# Altium PCB contador_geiger.PcbDoc
Units mm, origin at the board's own origin, x right, y up, seen from the top; angles counter-clockwise.
Board outline 120 x 75 mm, 2 copper layers (Top Layer, Bottom Layer), stack 1.63 mm thick; 53 components, 33 nets, 139 pads, 0 vias.
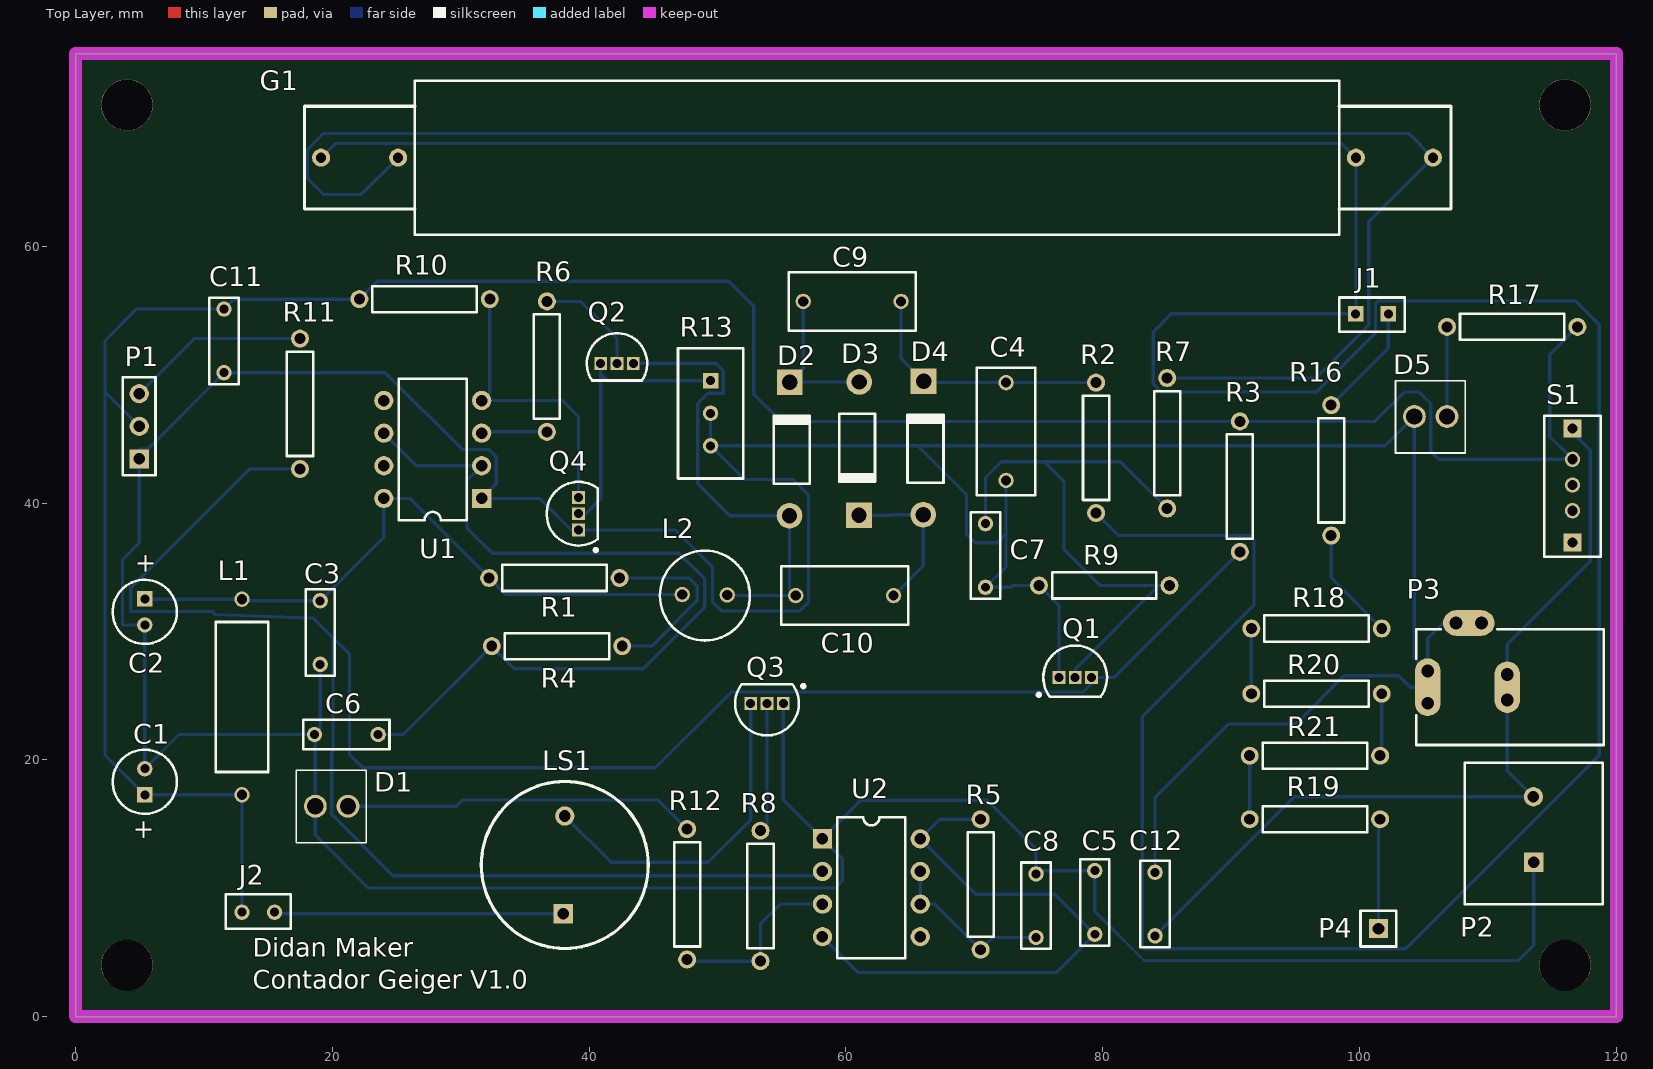
[diagram p0: Top Layer view]
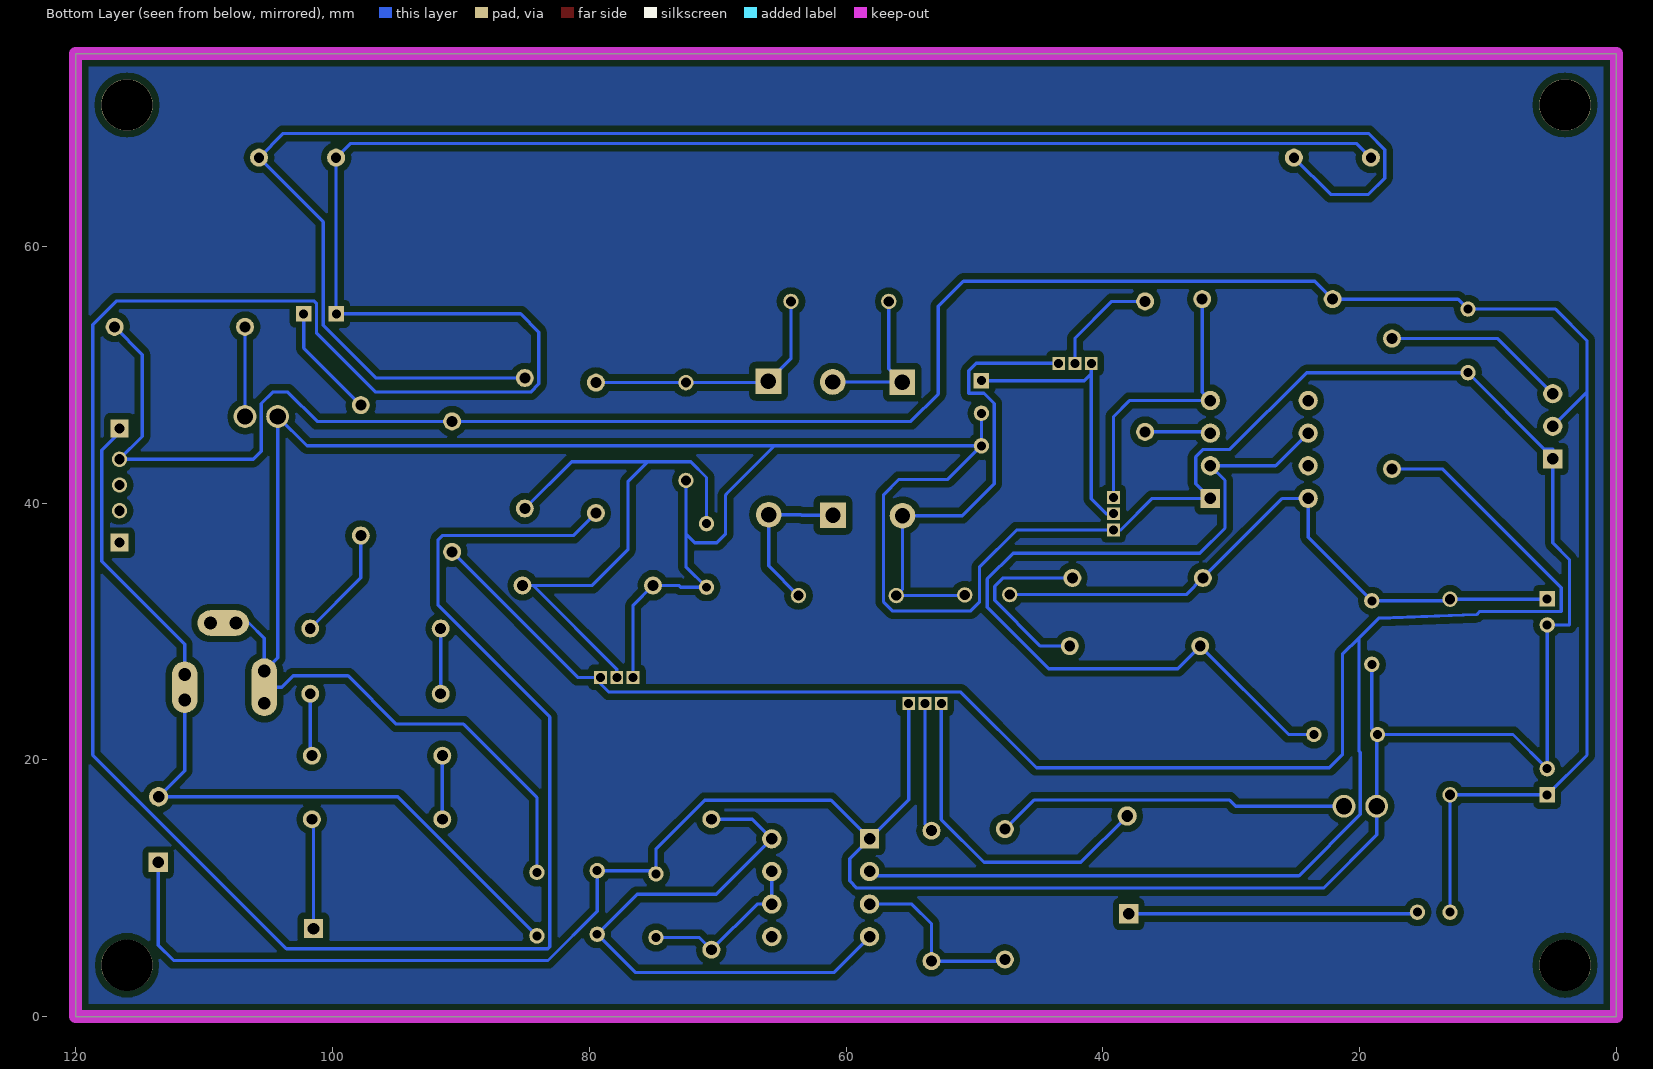
[diagram p1: Bottom Layer view, seen from below]
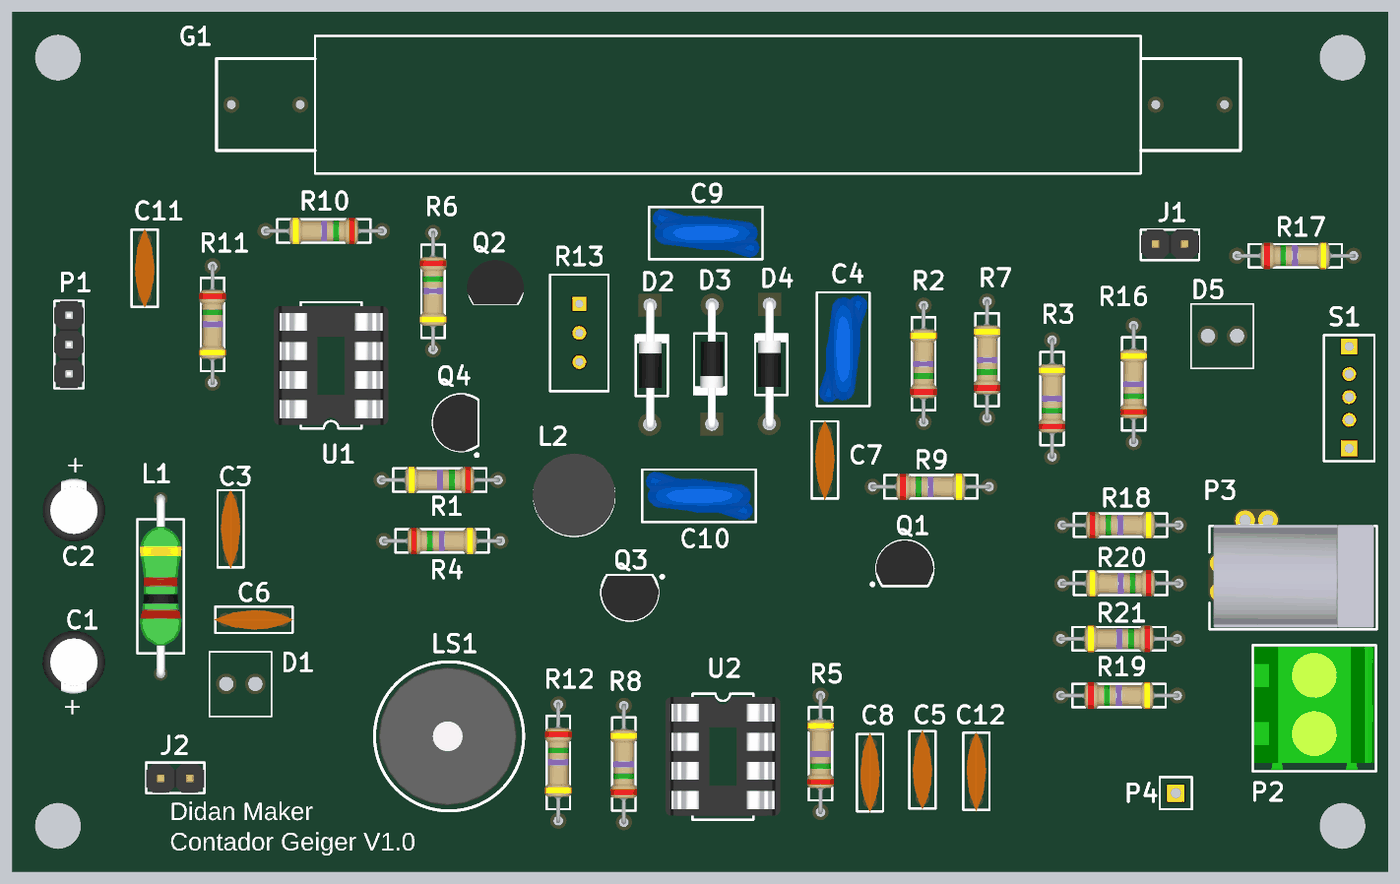
[diagram p2: 3D render of the assembled board from above, using the file's embedded part models]

## Layer stack, top to bottom
Top Solder: solder mask 0.0102, Solder Resist, Dk 3.5
Top Layer: signal copper -0.006
Dielectric 1: dielectric 1.6, FR-4, Dk 4.8
Bottom Layer: signal copper 0.0356
Bottom Solder: solder mask 0.0102, Solder Resist, Dk 3.5

## Board outline
0,0 0,75 120,75 120,0

## Design rules (kind name [scope] priority, off if disabled: settings)
Clearance Clearance_3 [InNamedPolygon('Bottom Layer')] p1: gap=0.5 ignorepadtopadclearanceinfootprint=FALSE
Clearance Clearance_2 [InNamedPolygon('Bottom Layer')] p2: gap=1 ignorepadtopadclearanceinfootprint=FALSE
Clearance Clearance_1 [InNamedPolygon('Bottom Layer')] p3: gap=2 ignorepadtopadclearanceinfootprint=FALSE
Clearance [All] p4: gap=0.254 ignorepadtopadclearanceinfootprint=FALSE
MinimumSolderMaskSliver [All] p1: minsoldermaskwidth=0.1
PolygonConnect [All] p1: connectstyle=Relief reliefconductorwidth=0.254 reliefentries=4 polygonreliefangle="90 Angle" airgapwidth=0.254
RoutingLayers [All] p1: top layer_v5=FALSE bottom layer_v5=TRUE
RoutingVias [All] p1: holewidth=0.711 width=1.27 viastyle="Through Hole" minholewidth=0.711 minwidth=1.27 maxholewidth=0.711 maxwidth=1.27
SilkToSolderMaskClearance [IsPad] p1: minsilkscreentomaskgap=0.1 clearancetoexposedcopper=TRUE
SolderMaskExpansion [All] p1: expansion=0.102
Width [All] p1: maxlimit=0.254 minlimit=0.254 preferedwidth=0.254
27 further rules are at their usual default settings.

## Classes and differential pairs
component class contador_geiger: C1 C2 C4 C5 C6 C7 C8 C9 C10 C12 D1 D2 D3 D4 D5 G1 J1 J2 L2 LS1 P2 P3 P4 Q1 Q2 Q3 Q4 R1 R2 R3 R4 R5 R6 R7 R8 R9 R10 R12 R13 R16 R17 R18 R19 R20 R21 S1 U1 U2

## Components (designator, comment, footprint, x,y, rotation, side; value= is the part's Value field where it differs from the comment)
C1 "Cap Pol1" RB7.6-15 5.385,18.288 r270 top value=100uF
C2 "Cap Pol1" RB7.6-15 5.385,31.521 r90 top value=100uF
C3 "Cap" RAD-0.3 19.05,29.909 r90 top value=100nF
C4 "10nF 1000V" Cap_10nF_1000V 72.466,48.489 r90 top
C5 "Cap" RAD-0.3 79.375,8.89 r270 top value=100nF
C6 "Cap" RAD-0.3 21.082,21.971 r0 top value=1nF
C7 "Cap" RAD-0.3 70.866,35.916 r90 top value=270pF
C8 "Cap" RAD-0.3 74.803,8.636 r270 top value=100nF
C9 "10nF 1000V" Cap_10nF_1000V 63.398,55.702 r0 top
C10 "10nF 1000V" Cap_10nF_1000V 62.814,32.791 r0 top
C11 "Cap" RAD-0.3 11.557,52.629 r270 top value=100nF
C12 "Cap" RAD-0.3 84.074,8.763 r90 top value=100nF
D1 "LED1" LED-0 19.939,16.383 r0 top
D2 "Diode 1N4937" DO-41 55.778,44.145 r90 top
D3 "Diode 1N4937" DO-41 60.858,44.298 r270 top
D4 "Diode 1N4937" DO-41 66.192,44.221 r90 top
D5 "LED1" LED-0 105.537,46.736 r0 top
G1 "Geiger" "TUBO GEIGER" 26.416,72.898 r0 top
J1 "Jumper" RAD-0.2#1 100.838,54.737 r180 top
J2 "Jumper" RAD-0.2#2 14.351,8.128 r0 top
L1 "Indutor_100uH" INDUTOR_100UH 14.478,20.828 r90 top
L2 "Indutor_10mH" INDUTOR_10MH 51.689,34.646 r0 top
LS1 "Speaker" PIN2 38.735,14.097 r270 top
P1 "ARDUINO" HDR1X3 4.953,43.434 r90 top
P2 "KRE-2" HDR1X2 114.046,12.827 r90 top
P3 "JACK" KLD-0202 119.006,25.654 r180 top
P4 "Plug" PIN1 101.473,6.858 r0 top
Q1 "2N3904" TO-92A 77.851,26.416 r270 top
Q2 "MPSA42" ONSC-TO-92-3-29-11 42.164,50.876 r0 top
Q3 "2N3904" TO-92A 53.848,24.384 r90 top
Q4 "2N3904" TO-92A 39.167,39.167 r0 top
R1 "Res2" AXIAL-0.4 37.033,31.75 r180 top value=33K
R2 "Res2" AXIAL-0.4 77.064,44.552 r90 top value=10M
R3 "Res2" AXIAL-0.4 88.265,41.529 r90 top value=47K
R4 "Res2" AXIAL-0.4 37.744,31.267 r0 top value=33K
R5 "Res2" AXIAL-0.4 68.072,10.541 r90 top value=470K
R6 "Res2" AXIAL-0.4 39.116,50.368 r270 top value=3K
R7 "Res2" AXIAL-0.4 82.601,44.907 r90 top value=10K
R8 "Res2" AXIAL-0.4 50.927,9.652 r90 top value=10K
R9 "Res2" AXIAL-0.4 80.366,35.992 r0 top value=470K
R10 "Res2" AXIAL-0.4 26.924,53.467 r180 top value=100K
R11 "Res2" AXIAL-0.4 19.888,47.473 r270 top value=470K
R12 "Res2" AXIAL-0.4 50.038,9.271 r270 top value=1K
R13 "RPot" VR5 49.454,46.99 r270 top value=100R
R16 "Res2" AXIAL-0.4 95.377,42.799 r90 top value=10M
R17 "Res2" AXIAL-0.4 112.141,56.134 r0 top value=1k
R18 "Res2" AXIAL-0.4 96.901,32.639 r0 top value=10M
R19 "Res2" AXIAL-0.4 96.774,17.78 r0 top value=10M
R20 "Res2" AXIAL-0.4 96.393,22.733 r180 top value=10M
R21 "Res2" AXIAL-0.4 96.266,17.907 r180 top value=10M
S1 "Chave_5_terminais" CHAVE_5_TERMINAIS 114.386,35.802 r0 top
U1 "TS555CN" DIP8 27.813,44.171 r90 top
U2 "TS555CN" DIP8 61.976,10.033 r270 top

## Footprints (in the part's own frame and the unit in brackets; to place one, negate y for a bottom-side part, rotate by r counter-clockwise, add the part's x,y. Pads: shape width x height; smd on the part's side, far side on the other; paste and mask are expansions set on the pad)
AXIAL-0.4 [mm] "Axial Device, Thru-Hole; 2 Leads; 0.4 in Pin Spacing"
  round 1.4 hole 0.85 unplated: 1(-5.334,-2.413) 2(4.826,-2.413)
  silkscreen extent -4.32,-3.43 3.81,-1.4, body extent -5.51,-3.57 5,-1.26, height 2.51
Cap_10nF_1000V [mm]
  round 1.2 hole 0.8 unplated: 1(-6.731,0) 2(0.889,0)
  silkscreen extent -7.87,-2.29 2.03,2.29, body extent -7.55,-2.13 1.76,2.11, height 11.6
CHAVE_5_TERMINAIS [mm]
  rect 1.4x1.4 hole 0.8: 1(2.2,10) 5(2.2,1.12)
  round 1.2 hole 0.8: 2(2.2,7.6) 3(2.2,5.6) 4(2.2,3.6)
  silkscreen extent 0,0 4.4,11
DIP8 [mm] "DIP; 8 Leads; Row Spacing 7.62 mm; Pitch 2.54 mm"
  rect 1.5x1.5 hole 0.9 unplated: 1(-3.81,-3.81)
  round 1.5 hole 0.9 unplated: 2(-1.27,-3.81) 3(1.27,-3.81) 4(3.81,-3.81) 5(3.81,3.81) 6(1.27,3.81) 7(-1.27,3.81) 8(-3.81,3.81)
  silkscreen extent -5.5,-2.65 5.5,2.65, body extent -5.21,-5 5.15,5, height 7.13
DO-41 [mm] "Diode, Axial; Body 5.2 x 2.7 mm (LxDia. max), Lead Dia. 0.86 mm (max)"
  round 2 hole 1.2 unplated: 1(-5.131,0.178)
  rect 2x2 hole 1.2 unplated: 2(5.258,0.152)
  silkscreen extent -2.65,-1.4 2.75,1.4, body extent -5.51,-0.86 5.66,1.14, height 1
HDR1X2 [mm] "Connector; Header; 2 Position"
  rect 1.5x1.5 hole 0.9 unplated: 1(-0.813,0.483)
  round 1.5 hole 0.9 unplated: 2(4.293,0.508)
  silkscreen extent -4.06,-4.88 6.93,5.87, body extent -3.93,-4.76 6.83,5.74, height 14.85
HDR1X3 [mm] "Connector; Header; 3 Position"
  rect 1.5x1.5 hole 0.9 unplated: 1(0,0)
  round 1.5 hole 0.9 unplated: 2(2.54,0) 3(5.08,0)
  silkscreen extent -1.27,-1.27 6.35,1.27, body extent -1.27,-1.27 6.35,1.27, height 8.6
INDUTOR_10MH [mm]
  round 1.2 hole 0.8 unplated: 1(-4.445,-1.778) 2(-0.94,-1.803)
  silkscreen extent -6.18,-5.35 0.82,1.65, body extent -6.3,-5.38 0.91,1.83, height 11
INDUTOR_100UH [mm]
  round 1.2 hole 0.8 unplated: 1(-3.556,1.524) 2(11.684,1.524)
  silkscreen extent -1.78,-0.51 9.91,3.56, body extent -3.91,-0.31 12.03,3.36, height 3.5
KLD-0202 [mm] "DC Power Jack, 2.5mm, KLD Series, PCB Mount"
  oval 2x4.5 all layers, no hole: 1(13.7,0)
  round 1.5 hole 1: 1A(13.7,-1.25) 1B(13.7,1.25) 2A(7.5,-1) 2B(7.5,1) 3A(9.5,-5) 3B(11.5,-5)
  oval 2x4 all layers, no hole: 2(7.5,0)
  oval 4x2 all layers, no hole: 3(10.5,-5)
  silkscreen extent 0,-4.5 14.6,4.5, body extent 0.25,-4.64 14.26,4.37, height 13.12
LED-0 [mil] "LED; 2 Leads"
  round 70 hole 50 unplated: 1(50,0) 2(-50,0)
  silkscreen extent -108,-112 106,110, body extent -100,-104 100,96, height 339
ONSC-TO-92-3-29-11 [mm] "TO, 3-Leads, Body Dia 4.7mm, Pitch 1.27mm"
  rect 1x1 hole 0.7 unplated: 1(-1.27,0) 2(0,0) 3(1.27,0)
  silkscreen extent -2.35,-1.34 2.35,2.35, body extent -2.53,-1.38 2.47,2.49, height 10.5
PIN1 [mm] "Connector; Plug"
  rect 1.5x1.5 hole 0.9: 1(0,0)
  silkscreen extent -1.4,-1.4 1.4,1.4
PIN2 [mm] "Photosensitive Diode; 2 Leads"
  rect 1.5x1.5 hole 0.9 unplated: 1(6.096,-0.762)
  round 1.5 hole 0.9 unplated: 2(-1.524,-0.635)
  silkscreen extent -4.21,-7.13 8.79,5.86, body extent -3.71,-6.75 8.29,5.25, height 11.5
RAD-0.2#1 [mm] "Radial Cap, Thru-Hole; 2 Leads; 0.2 in Pin Spacing"
  rect 1.2x1.2 hole 0.7 unplated: 1(-1.397,0) 2(1.143,0)
  silkscreen extent -2.67,-1.27 2.41,1.4, body extent -2.67,-1.27 2.41,1.27, height 8.6
RAD-0.2#2 [mm] "Radial Cap, Thru-Hole; 2 Leads; 0.2 in Pin Spacing"
  round 1.2 hole 0.7 unplated: 1(-1.397,0) 2(1.143,0)
  silkscreen extent -2.67,-1.27 2.41,1.4, body extent -2.67,-1.27 2.41,1.27, height 8.6
RAD-0.3 [mm] "Radial Cap, Thru-Hole; 2 Leads; 0.3 in Pin Spacing"
  round 1.2 hole 0.7 unplated: 1(-2.476,0) 2(2.476,0)
  silkscreen extent -3.37,-1.14 3.37,1.14, body extent -3.52,-0.85 3.47,0.85, height 7.82
RB7.6-15 [mm] "Polarized Capacitor (Radial); 2 Leads"
  rect 1.2x1.2 hole 0.7 unplated: 1(1.016,0)
  round 1.2 hole 0.7 unplated: 2(-1.016,0)
  silkscreen extent -2.5,-2.5 2.5,2.5, body extent -2.75,-2.75 2.75,2.75, height 12.5
TO-92A [mm] "TO, Flat Index; 3 In-Line, Axial Leads; Body Dia. 4.5mm; Leads 0.51 x 0.48 mm (max)"
  rect 1x1 hole 0.7 unplated: 1(0,-1.27) 2(0,0) 3(0,1.27)
  silkscreen extent -2.48,-2.95 1.5,2.48, body extent -2.49,-2.53 1.38,2.47, height 8.5
"TUBO GEIGER" [mm]
  round 1.4 hole 0.8 unplated: 1(-7.3,-6) 1(73.3,-6) 2(-1.3,-6) 2(79.3,-6)
  silkscreen extent -8.6,-12 80.7,0
VR5 [mm] "Thru-Hole; 3 Leads"
  rect 1.2x1.2 hole 0.7: 1(-2.54,0)
  round 1.2 hole 0.7: 2(0,0) 3(2.54,0)
  silkscreen extent -5.08,-2.54 5.08,2.54, body extent -4.85,-2.54 4.85,2.24, height 11.11

## Part data
C1 C2: "Polarized Capacitor (Radial)", LatestRevisionDate=17-Jul-2002, LatestRevisionNote="Re-released for DXP Platform.", PackageDescription="Polarized Capacitor (Radial); 2 Leads", PackageReference=RB7.6-15, Published=8-Jun-2000, Publisher="Altium Limited"
C3 C5 C6 C7 C8 C11 C12: "Capacitor", LatestRevisionDate=17-Jul-2002, LatestRevisionNote="Re-released for DXP Platform.", PackageDescription="Radial Cap, Thru-Hole; 2 Leads; 0.3 in Pin Spacing", PackageReference=RAD-0.3, Published=8-Jun-2000, Publisher="Altium Limited"
C4 C9 C10: library part Capacitor_10n/1000V
D1 D5: library part LED0, "Typical INFRARED GaAs LED", LatestRevisionDate=08-Jul-2005, LatestRevisionNote="Mech Layer 1 removed.", PackageDescription="LED; 2 Leads", PackageReference=LED-0, Published=8-Jun-2000, Publisher="Altium Limited"
D2 D3 D4: library part "Diode 1N4934", "1 Amp Fast Recovery Rectifier", Code_JEDEC=DO-204-AL, ComponentLink1Description="Manufacturer Link", ComponentLink1URL=http://www.fairchildsemi.com/, ComponentLink2Description=Datasheet, ComponentLink2URL=http://www.fairchildsemi.com/ds/1N%2F1N4934.pdf, DatasheetVersion=1999, LatestRevisionDate=17-Jul-2002, LatestRevisionNote="Re-released for DXP Platform.", PackageDescription="Diode, Axial; Body 5.2 x 2.7 mm (LxDia. max), Lead Dia. 0.86 mm (max)", PackageReference=DO-41, PackageVersion=Aug-1999, Published=8-Jun-2000, Publisher="Altium Limited"
G1: library part Tubo_Geiger
J1 J2: "Jumper Wire", LatestRevisionDate=17-Jul-2002, LatestRevisionNote="Re-released for DXP Platform.", PackageDescription="Radial Cap, Thru-Hole; 2 Leads; 0.2 in Pin Spacing", PackageReference=RAD-0.2, Published=24-Mar-1999, Publisher="Altium Limited"
LS1: "Loudspeaker", LatestRevisionDate=17-Jul-2002, LatestRevisionNote="Re-released for DXP Platform.", PackageReference=PIN2, Published=24-Mar-1999, Publisher="Altium Limited"
P1: library part "Header 3", "Header, 3-Pin", LatestRevisionDate=17-Jul-2002, LatestRevisionNote="Re-released for DXP Platform.", Publisher="Altium Limited"
P2: library part "Header 2", "Header, 2-Pin", LatestRevisionDate=17-Jul-2002, LatestRevisionNote="Re-released for DXP Platform.", Publisher="Altium Limited"
P3: library part PWR2.5, "Low Voltage Power Supply Connector", ComponentLink1Description="Manufacturer Link", ComponentLink1URL=http://domino.kycon.com/internet/Products.html, DatasheetDocument=09-May-2002, Published=17-Dec-2003, Publisher="Altium Limited"
Q1 Q3 Q4: "NPN General Purpose Amplifier", ComponentLink1Description="Manufacturer Link", ComponentLink1URL=http://www.fairchildsemi.com/, ComponentLink2Description=Datasheet, ComponentLink2URL=http://www.fairchildsemi.com/ds/2N%2F2N3904.pdf, DatasheetVersion=1997, LatestRevisionDate=15-Jan-2003, LatestRevisionNote="PCB Footprint 'BCY-W3/D4.7' replaced", PackageDescription="TO, Flat Index; 3 In-Line, Axial Leads; Body Dia. 4.5mm; Leads 0.51 x 0.48 mm (max)", PackageReference=TO-92A, PackageVersion=Sep-1998, Published=8-Jun-2000, Publisher="Altium Limited"
Q2: "High Voltage Transistor, NPN Silicon, 3-Pin TO-92, Bulk Box", Manufacturer="On Semiconductor", ComponentLink1Description="Manufacturer URL", ComponentLink1URL=http://www.onsemi.com/, ComponentLink2Description=Datasheet, ComponentLink2URL=http://www.onsemi.cn/pub_link/Collateral/MPSA42-D.PDF, ComponentLink3Description="Package Specification", ComponentLink3URL=http://www.onsemi.cn/pub_link/Collateral/2N6426-D.PDF, DatasheetVersion="Rev. 8", fT Min (MHz)=50, IC Continuous (A)=0.5, Mounting Technology="Through Hole", Note=0, PackageDescription="3-Pin Transistor Outline, Body 4.825 x 3.685 mm, Pitch 1.27 mm", PackageReference=TO-92-3-29-11_AM_SL, PackageVersion="Rev. AM", Packing="Bulk Box", PartNumber=MPSA42, Polarity=NPN, RoHS=FALSE
R1 R2 R3 R4 R5 R6 R7 R8 R9 R10 R11 R12 R16 R17 R18 R19 R20 R21: "Resistor", LatestRevisionDate=17-Jul-2002, LatestRevisionNote="Re-released for DXP Platform.", PackageDescription="Axial Device, Thru-Hole; 2 Leads; 0.4 in Pin Spacing", PackageReference=AXIAL-0.4, Published=8-Jun-2000, Publisher="Altium Limited"
R13: "Potentiometer", LatestRevisionDate=17-Jul-2002, LatestRevisionNote="Re-released for DXP Platform.", PackageDescription="Variable Resistor, Thru-Hole; 3 Leads", PackageReference=VR5, Published=8-Jun-2000, Publisher="Altium Limited", Set Position=0.5, Sim Note="Enter the Resistance value and the set point into parameter fields."
U1 U2: "Low-Power Single CMOS Timer", Code_JEDEC=MO-001-AN, ComponentLink1Description="Manufacturer Link", ComponentLink1URL=http://www.st.com/, ComponentLink2Description=Datasheet, ComponentLink2URL=http://www.st.com/stonline/products/literature/ds/4077/ts555.pdf, DatasheetVersion=Jan-1999, LatestRevisionDate=06-Jun-2005, LatestRevisionNote="Stylized 3D Model Added.", PackageDescription="DIP; 8 Leads; Row Spacing 7.62 mm; Pitch 2.54 mm", PackageReference=DIP8, Published=24-Aug-2001, Publisher="Altium Limited"
P4: LatestRevisionDate=17-Jul-2002, LatestRevisionNote="Re-released for DXP Platform.", Publisher="Altium Limited"

## Free pads (board coordinates)
  round 4 hole 4 unplated: FIX(4,4) FIX(4,71) FIX(116,4) FIX(116,71)

## Nets (pads, with @x,y where several pads share a name; then routed paths per layer and width w, separated by ;. In a path a pad name is that pad's centre, name@x,y a point inside that pad or via, vN(x,y) a via of type N, cw(c..) or ccw(c..) an arc to the next point about the centre after c; other vN are vias at no path point)
5V: C1.1 C11.1 J2.1 L1.1 P1.2 R3.2 R10.2 R17.2 S1.2 | length 199.1
  Bottom Layer w0.254: 2.299,48.628 P1.2 ; J2.1 L1.1 C1.1 2.286,20.371 2.286,52.654 4.737,55.105 C11.1 12.332,55.88 R10.2 23.495,57.277 50.851,57.277 52.807,55.321 52.807,48.489 54.94,46.355 R3.2 101.194,46.355 103.48,48.641 104.648,48.641 105.537,47.752 105.537,44.037 106.172,43.402 S1.2 114.808,45.18 114.808,51.562 R17.2
"400V HV TP": J1.1 R16.2 | length 9
  Bottom Layer w0.254: R16.2 102.235,52.07 J1.1
GND: C1.2 C2.2 C3.1 C4.1 C5.1 C6.1 C7.1 C8.1 C11.2 C12.2 D1.2 D5.2 P1.1 P2.1 P3.1 P3.1A P3.1B P3.3 P3.3A P3.3B Q1.1 Q3.1 Q4.1 R9.1 R13.2 R13.3 U1.1 U2.1 | length 423.6
  Bottom Layer w0.254: C3.1 19.05,22.415 C6.1 ; R13.2 R13.3 ; Q3.1 55.118,16.891 U2.1 ; C4.1 72.466,37.592 ; Q1.1 76.581,32.029 R9.1 73.012,33.579 72.873,33.439 C7.1 72.466,35.039 72.466,37.592 ; C12.2 84.074,17.069 89.789,22.784 95.021,22.784 98.781,26.543 103.048,26.543 103.937,25.654 P3.1 ; P3.1B P3.1 ; P3.3A P3.3 P3.3B 106.496,30.654 105.306,29.464 P3.1A ; P2.1 113.563,5.563 112.37,4.369 83.21,4.369 79.375,8.204 C5.1 75.057,11.367 C8.1 74.803,13.03 70.993,16.84 61.163,16.84 U2.1 ; C6.1 18.669,21.907 D1.2 18.669,14.148 22.809,10.008 59.157,10.008 59.715,10.566 59.715,12.294 U2.1 ; C6.1 8.052,21.971 C1.2 C2.2 3.658,30.505 3.658,35.601 4.953,36.897 P1.1 4.953,44.196 5.601,44.196 C11.2 24.117,50.152 30.099,44.171 32.182,44.171 32.766,43.586 32.766,41.504 U1.1 36.144,40.361 38.608,37.897 Q4.1 46.711,37.897 49.606,35.001 49.606,32.258 50.267,31.598 56.388,31.598 57.074,32.283 57.074,40.64 55.874,41.84 52.064,41.84 R13.3 ; R13.3 65.567,44.45 ; 65.567,44.45 69.317,40.7 69.317,40.691 69.377,40.63 69.377,37.592 70.066,36.903 71.777,36.903 72.466,37.592 ; 65.567,44.45 101.981,44.45 D5.2 104.267,27.943 P3.1A ; P3.1 P3.1A
INT: P1.3 R11.1 | length 14.3
  Bottom Layer w0.254: P1.3 9.246,52.807 R11.1
NetC2_1: C2.1 C3.2 L1.2 L2.1 R1.2 U1.8 | length 50.1
  Bottom Layer w0.254: C2.1 5.41,32.512 L1.2 13.081,32.385 C3.2 24.003,37.338 U1.8 26.01,40.361 R1.2 33.503,32.868 L2.1
NetC4_2: C4.2 C9.2 D4.2 R2.2 | length 20.4
  Bottom Layer w0.254: C9.2 64.287,51.232 D4.2 66.142,49.378 C4.2 R2.2
NetC5_2: C5.2 R5.2 U2.4 U2.8 | length 45.6
  Bottom Layer w0.254: U2.4 60.96,3.429 76.391,3.429 C5.2 76.263,9.525 70.104,9.525 U2.8 67.31,15.367 R5.2
NetC6_2: C6.2 R4.1 U1.2 U1.6 | length 67.4
  Bottom Layer w0.254: C6.2 25.527,21.971 R4.1 34.163,27.102 44.221,27.102 48.997,31.877 48.997,34.087 46.99,36.093 32.436,36.093 30.48,38.049 30.48,41.758 U1.2 26.543,42.901 U1.6
NetC7_2: C7.2 Q1.2 R7.1 R9.2 | length 46.5
  Bottom Layer w0.254: C7.2 70.866,41.986 72.097,43.218 75.426,43.218 ; Q1.2 77.851,27.051 84.379,33.579 ; R7.1 81.369,43.218 75.426,43.218 ; R9.2 84.379,33.579 ; 75.426,43.218 76.987,41.656 76.987,36.347 79.756,33.579 84.379,33.579
NetC8_2: C8.2 R5.1 U2.6 U2.7 | length 13.4
  Bottom Layer w0.254: U2.7 U2.6 66.929,8.763 R5.1 71.438,6.159 C8.2
NetC9_1: C9.1 D2.2 D3.1 | length 12.1
  Bottom Layer w0.254: D2.2 D2.2@55.651,49.428 ; C9.1 56.667,50.444 D2.2@55.651,49.428 ; D3.1 D2.2@55.651,49.428
NetC10_1: C10.1 D2.1 L2.2 Q2.3 | length 37.5
  Bottom Layer w0.254: Q2.3 49.86,50.876 50.444,50.292 50.444,48.539 49.251,48.539 48.463,47.752 48.463,41.504 50.952,39.014 D2.1 55.601,33.274 C10.1 50.8,32.791 L2.2
NetC10_2: C10.2 D3.2 D4.1 | length 12.3
  Bottom Layer w0.254: D3.2 63.475,39.04 63.525,39.091 D4.1 66.015,35.103 C10.2
NetC12_1: C12.1 P2.2 P3.2 P3.2A P3.2B S1.1 | length 66.4
  Bottom Layer w0.254: C12.1 94.907,17.12 P2.2 111.506,19.152 P3.2B P3.2 P3.2A 111.506,29.007 117.958,35.458 117.958,44.118 S1.1@116.57,45.505
NetD1_1: D1.1 R12.1 | length 27.6
  Bottom Layer w0.254: D1.1 29.642,16.383 30.124,16.866 45.364,16.866 R12.1
NetD5_1: D5.1 R17.1 | length 7
  Bottom Layer w0.254: D5.1 R17.1
NetG1_1: G1.1 J1.2 R2.1 | length 278
  Bottom Layer w0.254: G1.1@19.116,66.898 20.214,67.996 98.618,67.996 99.716,66.898 99.716,54.758 J1.2 85.344,54.737 83.922,53.315 83.922,49.276 84.557,48.641 96.622,48.641 101.244,53.264 101.244,55.55 101.422,55.728 116.84,55.728 118.669,53.899 118.669,20.371 103.581,5.283 83.236,5.283 83.083,5.436 83.083,23.343 91.77,32.029 91.77,37.135 91.44,37.465 81.229,37.465 R2.1
NetG1_2: G1.2 R7.2 | length 132.5
  Bottom Layer w0.254: G1.2@25.116,66.898 22.251,64.033 19.304,64.033 18.034,65.303 18.034,67.513 19.304,68.783 103.831,68.783 105.716,66.898 100.711,61.893 100.711,53.848 96.596,49.733 R7.2
NetJ2_2: J2.2 LS1.1 | length 22.5
  Bottom Layer w0.254: J2.2 15.621,8.001 LS1.1
NetLS1_2: LS1.2 Q3.3 | length 26.4
  Bottom Layer w0.254: LS1.2 41.707,12.014 49.251,12.014 52.578,15.342 Q3.3
NetP4_1: P4.1 R19.2 | length 8.6
  Bottom Layer w0.254: P4.1 101.473,15.24 R19.2
NetQ1_3: Q1.3 R3.1 R11.2 U2.2 | length 176.6
  Bottom Layer w0.254: R11.2 13.532,42.647 4.293,33.407 4.293,31.556 10.227,31.556 ; U2.2 57.836,10.973 24.714,10.973 19.939,15.748 19.939,20.574 20.041,20.676 20.041,29.515 ; R3.1 80.899,26.416 Q1.3 79.121,25.933 78.461,25.273 51.054,25.273 45.161,19.38 22.352,19.38 21.336,20.396 21.336,28.219 20.041,29.515 ; 10.227,31.556 10.658,31.541 ; 10.227,31.556 10.643,31.556 10.658,31.541 ; 10.658,31.541 10.891,31.308 18.521,31.034 20.041,29.515
NetQ2_1: Q2.1 Q4.2 R13.1 | length 21.5
  Bottom Layer w0.254: Q4.2 39.726,39.167 40.894,40.335 40.894,50.063 ; Q2.1 40.894,50.063 ; R13.1 41.427,49.53 40.894,50.063
NetQ2_2: Q2.2 R6.1 | length 8.6
  Bottom Layer w0.254: R6.1 39.294,55.702 42.164,52.832 Q2.2
NetQ3_2: Q3.2 R8.2 | length 10.1
  Bottom Layer w0.254: R8.2 53.848,14.986 Q3.2
NetQ4_3: Q4.3 R10.1 U1.4 | length 22.5
  Bottom Layer w0.254: R10.1 32.258,48.616 U1.4 37.922,47.981 39.167,46.736 Q4.3
NetR1_1: R1.1 R4.2 | length 14.7
  Bottom Layer w0.254: R1.1 47.752,34.163 48.412,33.503 48.412,32.41 44.856,28.854 R4.2
NetR6_2: R6.2 U1.3 | length 5.1
  Bottom Layer w0.254: U1.3 31.725,45.542 R6.2
NetR8_1: R8.1 R12.2 U2.3 | length 14.1
  Bottom Layer w0.254: R12.2 47.752,4.318 R8.1 53.34,7.239 54.864,8.763 U2.3
NetR16_1: R16.1 R18.2 | length 8.9
  Bottom Layer w0.254: R16.1 97.79,34.163 R18.2
NetR18_1: R18.1 R20.2 | length 5.1
  Bottom Layer w0.254: R20.2 R18.1
NetR19_1: R19.1 R21.2 | length 5
  Bottom Layer w0.254: R19.1 R21.2
NetR20_1: R20.1 R21.1 | length 4.9
  Bottom Layer w0.254: R21.1 101.727,20.447 R20.1
pads on no net: S1.3 S1.4 S1.5 U1.5 U1.7 U2.5

## Polygon pours and split planes (outlines as drawn)
no net on Bottom Layer "Bottom Layer" (solid, pour order 2): 0,75 0,0 120,0 120,75

## Keep-outs
Keep-Out Layer:
  the board outline again, w1

## Silkscreen, mask and mechanical layers (free items; w line width, h text height)
Top Overlay:
  text "Didan Maker  / Contador Geiger V1.0" at 13.792,1.651 h2.5

## Text inside footprints (layer, text, board x,y; h text height)
C1: Top Overlay "+" at 4.674,15.392 h1.5 r270
C2: Top Overlay "+" at 6.096,34.417 h1.5 r90